# Altium PCB Battery charging module.PcbDoc
Units mil, origin at the board's own origin, x right, y up, seen from the top; angles counter-clockwise.
Board outline 1305 x 980 mil, 2 copper layers (Top Layer, Bottom Layer); 14 components, 9 nets, 35 pads, 0 vias.
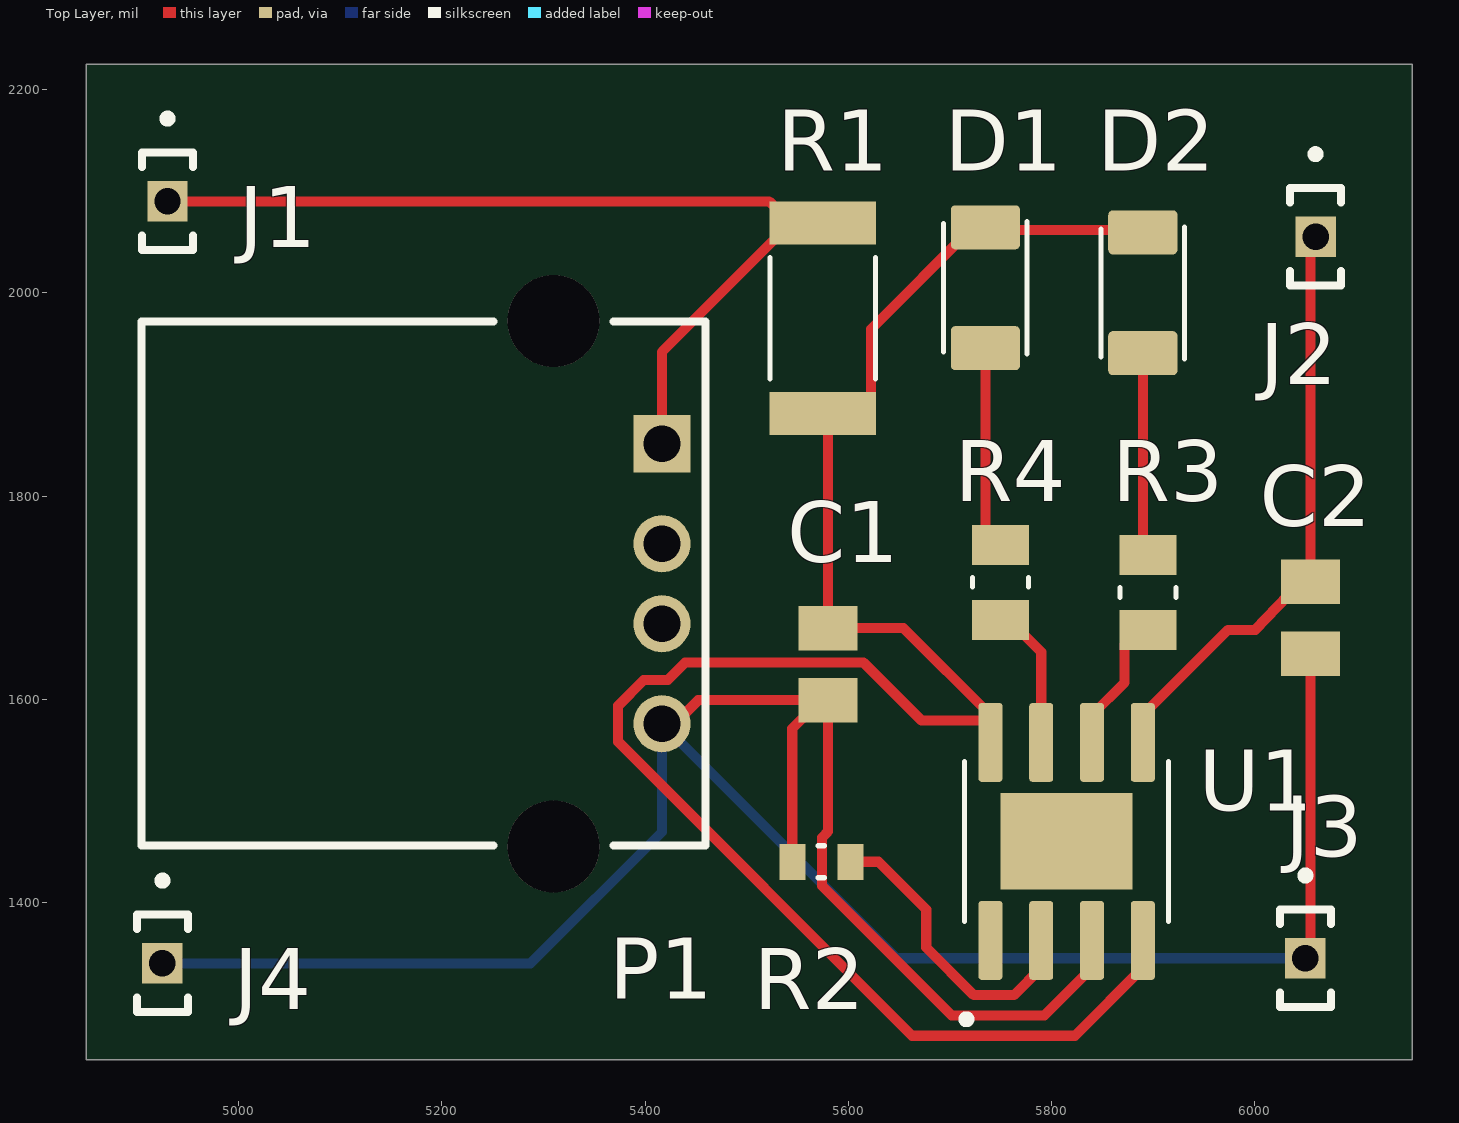
[diagram p0: Top Layer view]
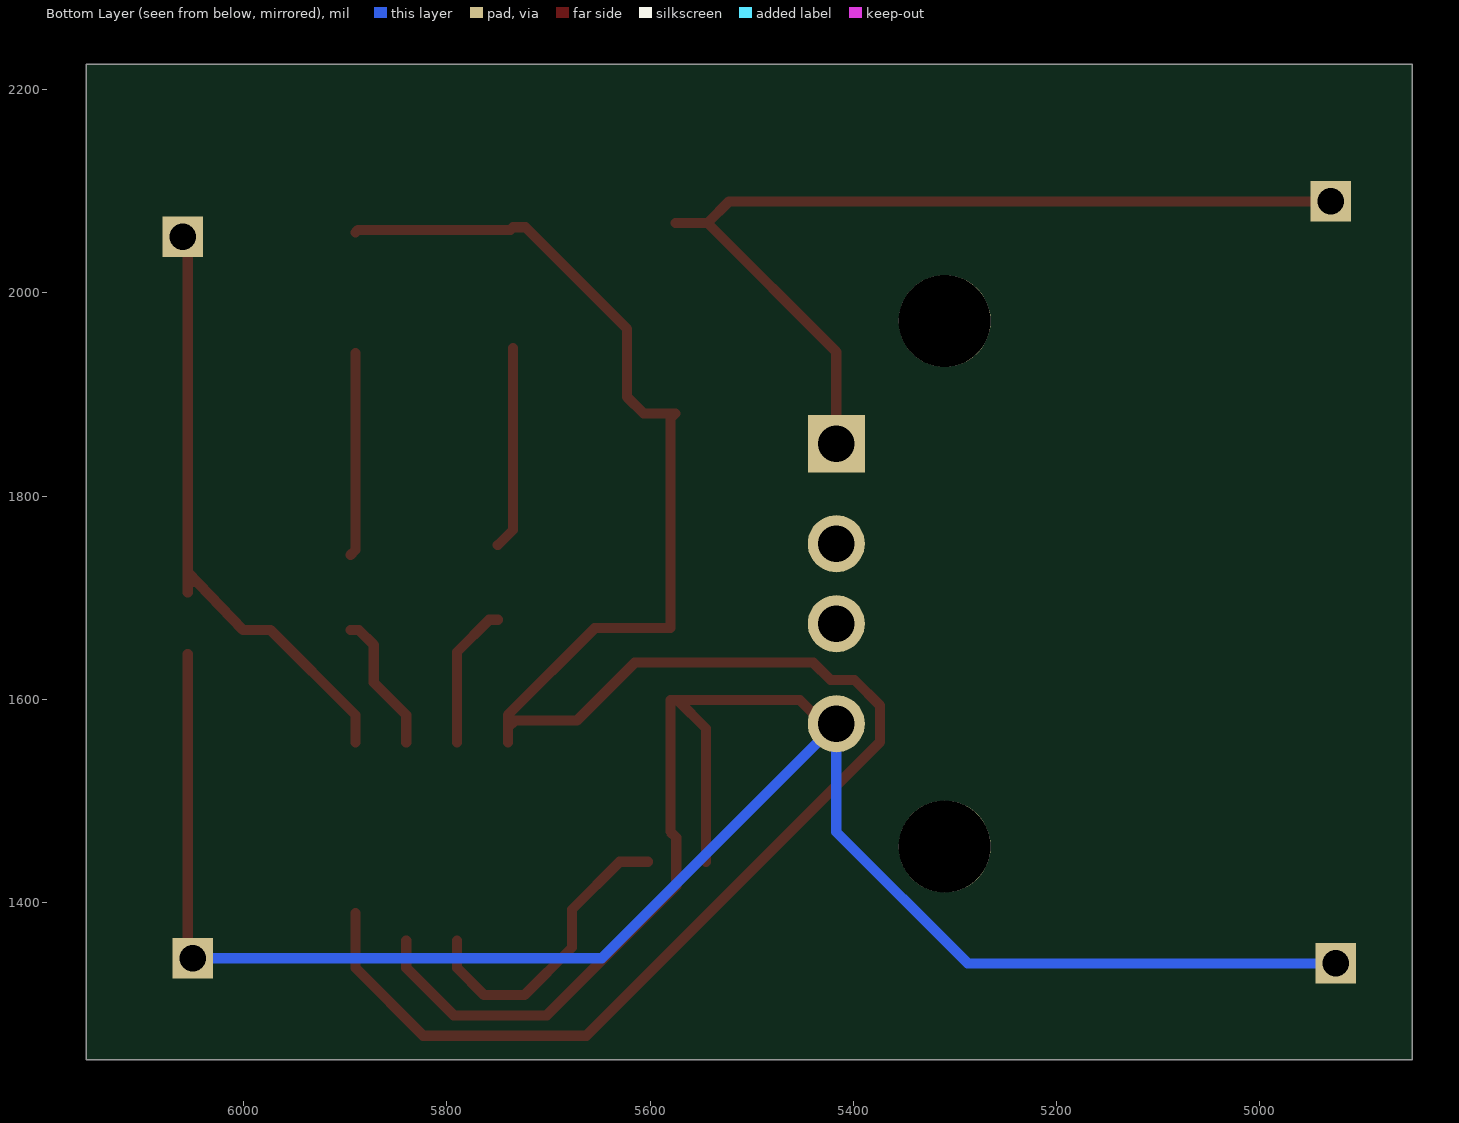
[diagram p1: Bottom Layer view, seen from below]
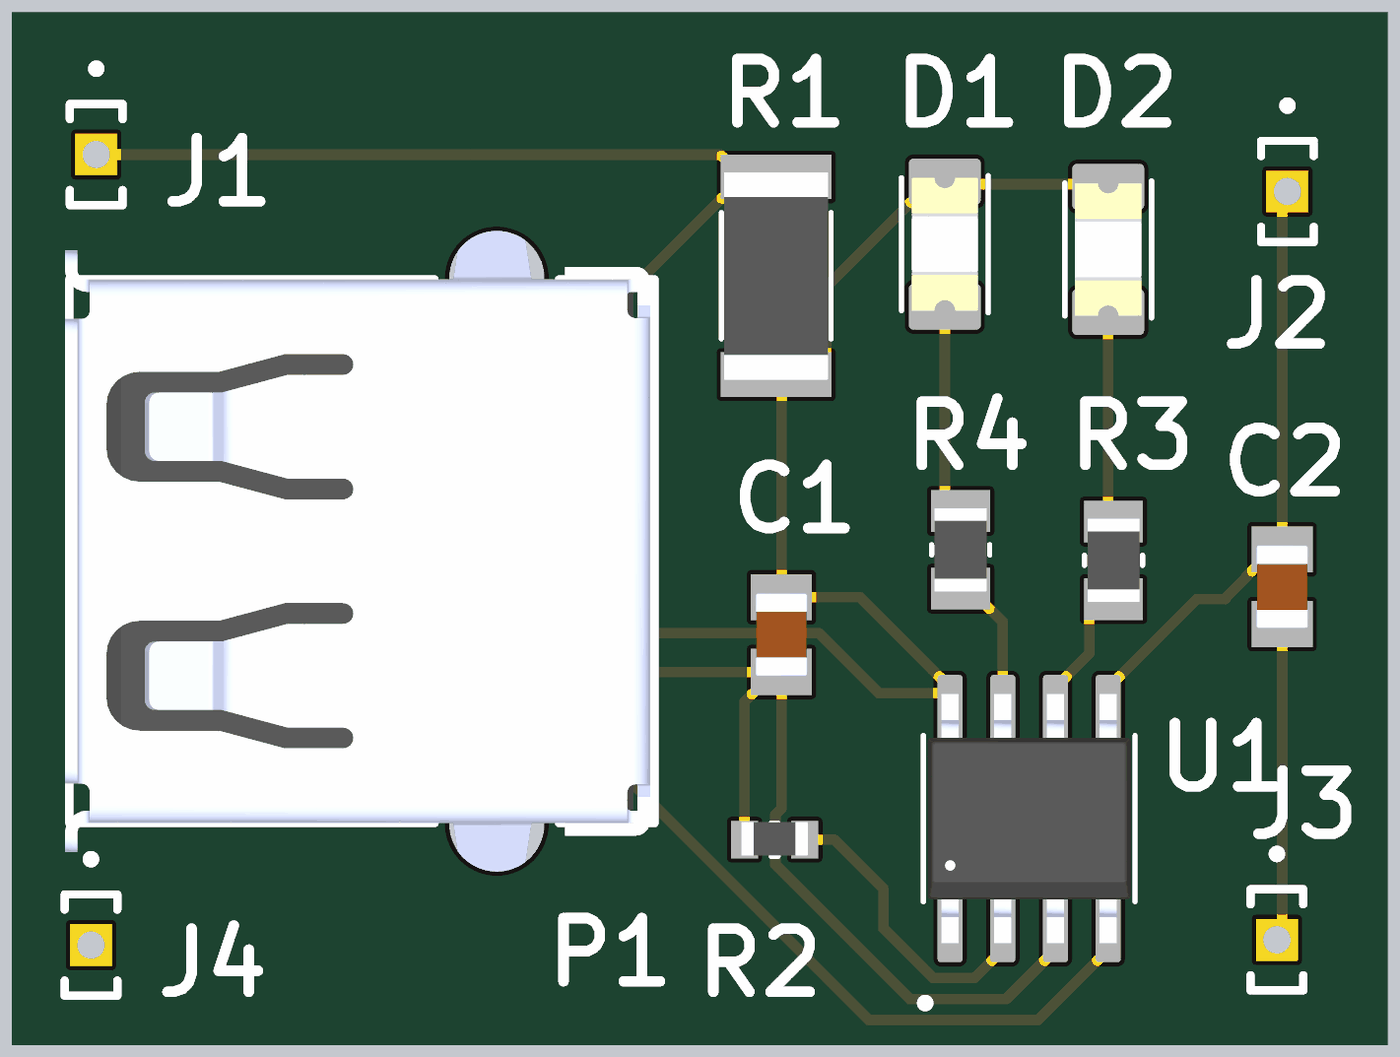
[diagram p2: 3D render of the assembled board from above, using the file's embedded part models]

## Layer stack, top to bottom
Top Solder: solder mask 0.4, Solder Resist, Dk 3.5
Top Layer: signal copper 1.4
Dielectric 1: dielectric 12.6, FR-4, Dk 4.8
Bottom Layer: signal copper 1.4
Bottom Solder: solder mask 0.4, Solder Resist, Dk 3.5

## Board outline
4850,1245 6155,1245 6155,2225 4850,2225

## Design rules (kind name [scope] priority, off if disabled: settings)
AssemblyTestPointUsage [All] p1 off:
AssemblyTestpoint [All] p1 off: testpointundercomponent=TRUE minsize=40 maxsize=100 preferedsize=60 minholesize=0 maxholesize=40 preferedholesize=32 testpointgrid=1 usegrid=TRUE gridtolerance=0.01 allowsidetop=TRUE allowsidebottom=TRUE
Clearance [All] p1: gap=10 ignorepadtopadclearanceinfootprint=FALSE except(15: Arc-Hole Track-Hole SMDPad-Hole THPad-Hole Via-Hole Fill-Hole Poly-Hole Region-Hole Text-Hole)
FabricationTestPointUsage [All] p1 off: valid=0 allowmultiple=FALSE
FabricationTestpoint [All] p1 off: side=3 testpointundercomponent=TRUE minsize=40 maxsize=100 preferedsize=60 minholesize=0 maxholesize=40 preferedholesize=32 testpointgrid=1 allowsidetop=TRUE allowsidebottom=TRUE usegrid=TRUE gridtolerance=0.01
MinimumSolderMaskSliver [All] p1: minsoldermaskwidth=3
PolygonConnect [All] p1: connectstyle=Relief reliefconductorwidth=10 reliefentries=4 polygonreliefangle="90 Angle" airgapwidth=10
RoutingVias [All] p1: holewidth=28 width=50 viastyle="Through Hole" minholewidth=28 minwidth=50 maxholewidth=28 maxwidth=50
SilkToSilkClearance [All] p1: silktosilkclearance=3
SilkToSolderMaskClearance [IsPad] p1: minsilkscreentomaskgap=4 clearancetoexposedcopper=TRUE
SolderMaskExpansion [All] p1: expansion=4 istentingtop=FALSE
Width [All] p1: maxlimit=20 minlimit=10 preferedwidth=15
23 further rules are at their usual default settings.

## Classes and differential pairs
component class Sheet3: C1 C2 D2 J1 J2 J3 J4 P1 R1 R2 R3 R4 U1

## Components (designator, comment, footprint, x,y, rotation, side; value= is the part's Value field where it differs from the comment)
C1 "10uff" CAPC2012X145N 5580,1634.57 r90 top
C2 "10uf" CAPC2012X145N 6055,1680 r90 top
D1 "RED" LEDC3216X110 5735,2005 r90 top
D2 "GREEN" LEDC3216X110 5890,2000 r90 top
J1 "VCC" SAMTEC_TMS-101-21-G-S 4930,2090 r0 top
J2 "BAT+" SAMTEC_TMS-101-21-G-S 6060,2055 r0 top
J3 "BAT-" SAMTEC_TMS-101-21-G-S 6050,1345 r0 top
J4 "GND" SAMTEC_TMS-101-21-G-S 4925,1340 r0 top
P1 "USB-A1HSW6" OST_USB-A1HSW6 5160.39,1713.66 r270 top
R1 "0.4" RESC5025X65N 5575,1975 r90 top
R2 "1.2K" RES_ERJP03D1201V 5573.54,1440 r0 top
R3 "1K" RESC2012X65N 5895,1705 r90 top
R4 "1K" RESC2012X65N 5750,1715 r90 top
U1 "TP4056" SOP127P600X175-9N 5815,1460 r90 top

## Footprints (in the part's own frame and the unit in brackets; to place one, negate y for a bottom-side part, rotate by r counter-clockwise, add the part's x,y. Pads: shape width x height; smd on the part's side, far side on the other; paste and mask are expansions set on the pad)
CAPC2012X145N [mm]
  rect 1.11x1.47 smd: 1(-0.9,0) 2(0.9,0)
  body extent -1,-0.63 1,0.63, height 1.45
LEDC3216X110 [mm]
  rrect20% 1.1x1.73 smd: A(1.51,0) C(-1.51,0)
  silkscreen extent -1.65,-1.04 1.65,1.04, body extent -1.6,-0.8 1.6,0.8, height 1.11
OST_USB-A1HSW6 [mm]
  rect 1.428x1.428 hole 0.92: 1(-3.5,6.51)
  round 1.428 hole 0.92: 2(-1,6.51) 3(1,6.51) 4(3.5,6.51)
  round 2.3 hole 2.3 unplated: ""(-6.57,3.8) ""(6.57,3.8)
  silkscreen extent -6.55,-6.5 6.55,7.6, body extent -7.9,-6.61 7.9,7.49, height 6.43
RES_ERJP03D1201V [mm]
  rect 0.65x0.9 smd: 1(-0.725,0) 2(0.725,0)
  silkscreen extent -0.08,-0.4 0.08,0.4, body extent -0.8,-0.38 0.8,0.42, height 0.46
RESC2012X65N [mm]
  rect 1x1.42 smd: 1(-0.935,0) 2(0.935,0)
  silkscreen extent -0.12,-0.7 0.12,0.7, body extent -1,-0.63 1,0.63, height 0.66
RESC5025X65N [mm]
  rect 1.07x2.67 smd: 1(-2.38,0) 2(2.38,0)
  silkscreen extent -1.52,-1.32 1.52,1.32, body extent -2.51,-1.25 2.49,1.25, height 0.66
SAMTEC_TMS-101-21-G-S [mm]
  rect 1.01x1.01 hole 0.66: 01(0,0)
  silkscreen extent -0.64,-1.22 0.64,2.17
SOP127P600X175-9N [mm]
  rrect25% 1.97x0.6 smd: 1(-2.475,1.905) 2(-2.475,0.635) 3(-2.475,-0.635) 4(-2.475,-1.905) 5(2.475,-1.905) 6(2.475,-0.635) 7(2.475,0.635) 8(2.475,1.905)
  rect 2.413x3.302 smd paste-3: 9(0,0)
  silkscreen extent -4.54,-2.55 2,2.6, body extent -3,-2.45 3,2.45, height 1.61

## Part data
C1 C2: library part GRM21BC81E106ME11L, Package=None, Availability=Unavailable, MP=GRM21BC81E106ME11L, Price=None
D1 D2: library part LTST-C230KRKT, "Red 631nm LED Indication - Discrete 2V 1206 _3216 Metric_", Package="1206 Lite-On", Digi-Key_Part_Number=160-1457-1-ND, Digi-Key_Purchase_URL=https://www.digikey.com/product-detail/en/lite-on-inc/LTST-C230KRKT/160-1457-1-ND/386856?utm_source=snapeda&utm_medium=aggregator&utm_campaign=symbol, MF="Lite-On Inc.", MP=LTST-C230KRKT, SnapEDA_Link=https://www.snapeda.com/parts/LTST-C230KRKT/Lite-On%20Inc./view-part/358143/?ref=snap
J1 J2 J3 J4: library part TMS-101-21-G-S, Package=None, Availability=Unavailable, MP=TMS-101-21-G-S, Price=None
P1: "USB - A Receptacle Connector 4 Position Through Hole, Right Angle", Package=None, Availability=Unavailable, MP=USB-A1HSW6, Price=None
R1: library part RL2010JK-070R4L, "RES SMD 400 MOHM 5% 3/4W 2010", Package=None, Availability=Unavailable, MP=RL2010JK-070R4L, Price=None
R2: library part ERJP03D1201V, Package=None, Availability=Unavailable, MP=ERJP03D1201V, Price=None
R3 R4: library part RN73C2A1K0BTG, "RESISTOR, THIN FILM, 1K, 0.1%, 0805", Package=0805, Power_Rating=".1 W", Tolerance=.1%, Voltage_Rating="100 V", Availability=Unavailable, DigiKey-Purchase-URL=https://snapeda.com/shop?store=DigiKey&id=613380, EU_RoHS_Compliance=Compliant, MF="TE Connectivity", MP=RN73C2A1K0BTG, Price=None, Resistance=1K, SnapEDA_Link=https://www.snapeda.com/parts/RN73C2A1K0BTG/TE%20Connectivity/view-part/613380/?ref=snap
U1: "Complete single cell Li-Ion battery with a constant current / constant voltage linear charger", Package=None, Availability=Unavailable, MP=TP4056, Price=None

## Nets (pads, with @x,y where several pads share a name; then routed paths per layer and width w, separated by ;. In a path a pad name is that pad's centre, name@x,y a point inside that pad or via, vN(x,y) a via of type N, cw(c..) or ccw(c..) an arc to the next point about the centre after c; other vN are vias at no path point)
GND: C1.1 C2.1 J3.01 J4.01 P1.4 R2.1 U1.3 | length 2576.2
  Top Layer w10: P1.4 5429.2,1575.87 5452.47,1599.13 C1.1@5572.91,1599.13 ; R2.1 5545,1571.22 C1.1@5572.91,1599.13 ; U1.3 5840,1335.59 5793.19,1288.78 5701.58,1288.78 5574.29,1416.07 5574.29,1463.93 5580,1469.64 C1.1 C1.1@5572.91,1599.13 ; J3.01 6055,1350 C2.1
  Bottom Layer w10: J4.01 5287.31,1340 5416.69,1469.38 P1.4 5647.56,1345 J3.01
NetC1_2: C1.2 D1.A D2.A R1.1 U1.4 U1.8 | length 2031.9
  Top Layer w10: U1.8 U1.8@5740,1572.08 ; U1.4@5890,1389.53 U1.4 5890,1335.59 5823.19,1268.78 5662.81,1268.78 5373.58,1558.01 5373.58,1593.72 5398.84,1618.98 5422.35,1618.98 5439.35,1635.98 5615.15,1635.98 5672.24,1578.89 5733.19,1578.89 U1.8@5740,1572.08 ; D2.A 5887.5,2061.95 5737.5,2061.95 D1.A 5722.6,2064.45 5622.56,1964.41 5622.56,1897.36 5606.5,1881.3 R1.1 5580,1876.3 C1.2 5654.41,1670 5740,1584.41 U1.8@5740,1572.08
NetC2_2: C2.2 J2.01 U1.5 | length 599.7
  Top Layer w10: U1.5 5890,1584.41 5973.87,1668.28 6000.76,1668.28 C2.2@6055,1725 ; C2.2@6047.91,1715.43 C2.2 ; C2.2@6055,1705 J2.01@6055,2039.57 ; J2.01@6055,2050 J2.01
NetD1_C: D1.C R4.2 | length 200.1
  Top Layer w10: D1.C 5735,1766.5 5749.69,1751.81 R4.2
NetD2_C: D2.C R3.2 | length 200.8
  Top Layer w10: D2.C 5890,1746.81 R3.2
NetJ1_01: J1.01 P1.1 R1.2 | length 923.6
  Top Layer w10: J1.01 5522.2,2090 R1.2@5543.5,2068.7 ; P1.1 5416.69,1941.89 R1.2@5543.5,2068.7 ; R1.2 R1.2@5543.5,2068.7
NetR2_2: R2.2 U1.2 | length 302.2
  Top Layer w10: R2.2 5629.88,1440 5676.79,1393.09 5676.79,1355.69 5723.71,1308.78 5763.19,1308.78 5790,1335.59 U1.2
NetR3_1: R3.1 U1.6 | length 138.4
  Top Layer w10: U1.6 5840,1584.41 5872.05,1616.46 5872.05,1653.5 5886.73,1668.19 R3.1
NetR4_1: R4.1 U1.7 | length 142.2
  Top Layer w10: R4.1 5758.27,1678.19 5790,1646.46 U1.7
pads on no net: P1. P1.2 P1.3 U1.1 U1.9

## Silkscreen, mask and mechanical layers (free items; w line width, h text height)
Top Component Outline:
  the board outline again, w4.92